# Altium PCB RFLOG V1.0.PcbDoc
Units mm, origin at the board's own origin, x right, y up, seen from the top; angles counter-clockwise.
Board outline 88 x 64 mm, 2 copper layers (Top Layer, Bottom Layer); 126 components, 96 nets, 492 pads, 0 vias.
Unrouted connection lines stored in the file: 339.
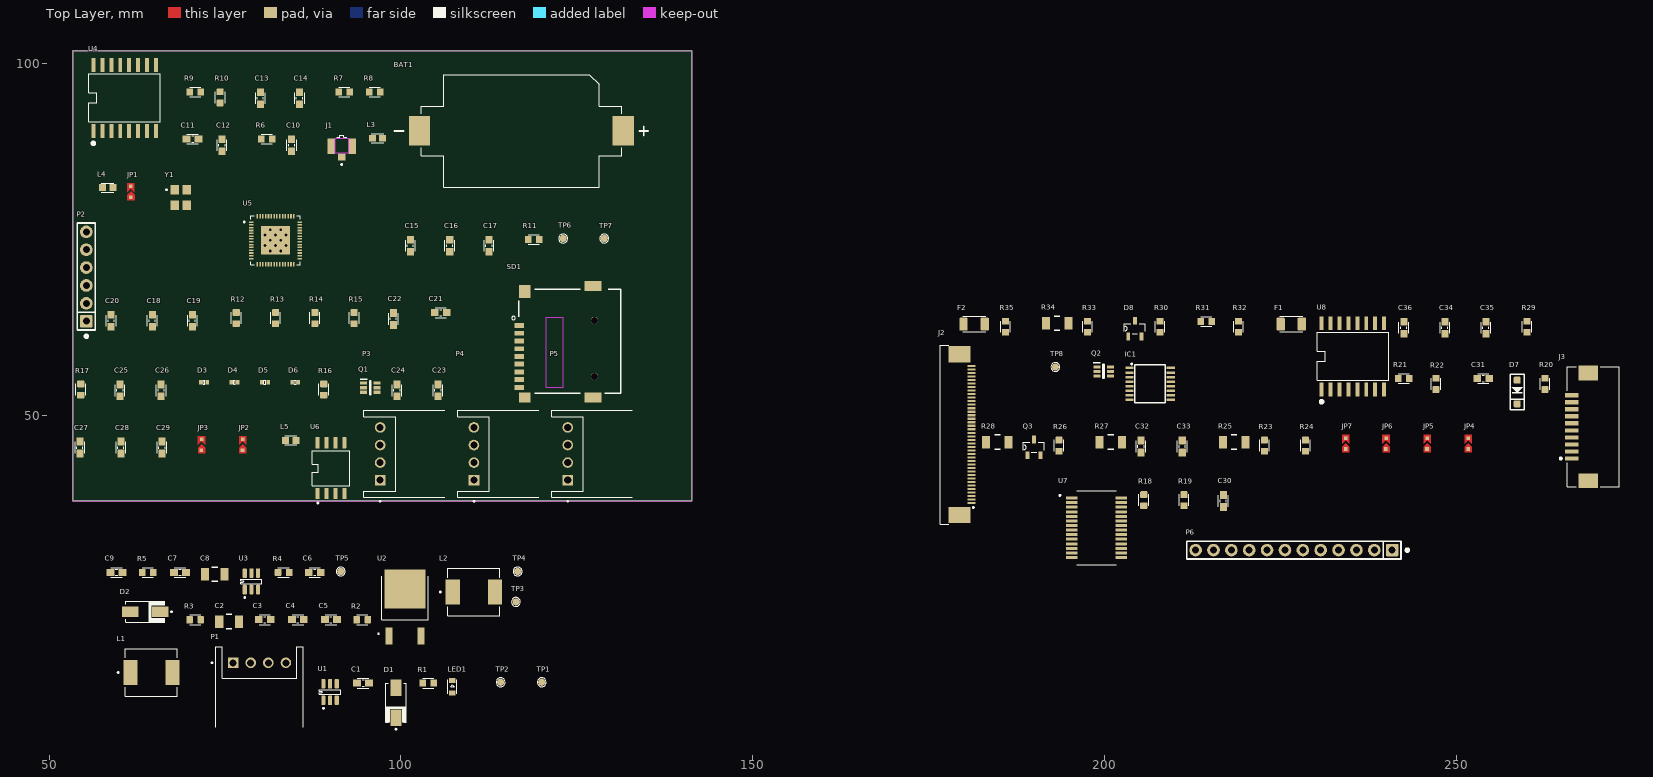
[diagram p0: Top Layer view]
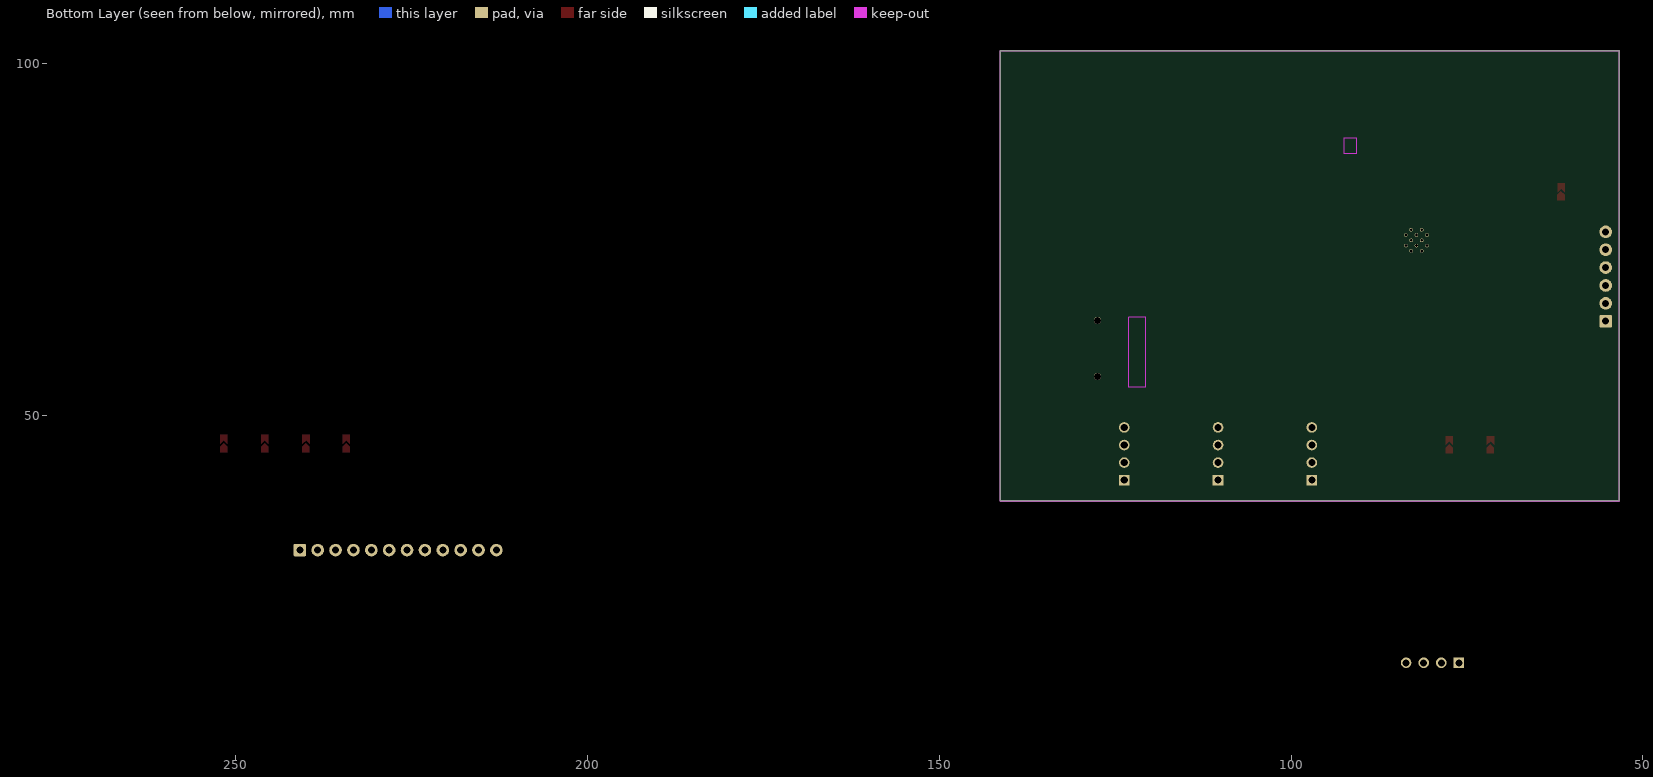
[diagram p1: Bottom Layer view, seen from below]

## Layer stack, top to bottom
Top Solder: solder mask 0.0102, Solder Resist, Dk 3.5
Top Layer: signal copper 0.0356
Dielectric 1: dielectric 0.32, FR-4, Dk 4.8
Bottom Layer: signal copper 0.0356
Bottom Solder: solder mask 0.0102, Solder Resist, Dk 3.5

## Board outline
53.34,37.854 53.34,101.854 141.34,101.854 141.34,37.854

## Design rules (kind name [scope] priority, off if disabled: settings)
Clearance [All] p1: gap=0.254 ignorepadtopadclearanceinfootprint=FALSE except(0: Arc-Hole Track-Hole SMDPad-Hole THPad-Hole Via-Hole Fill-Hole Poly-Hole Region-Hole Text-Hole)
PolygonConnect [All] p1: connectstyle=Relief reliefconductorwidth=0.254 reliefentries=4 polygonreliefangle="90 Angle" airgapwidth=0.254
RoomDefinition PSU [InComponentClass('PSU')] p1: confinementstyle=ConfineIn formatcopy=TRUE lockcomponents=FALSE outline 57.658,3.937 124.466,3.937 124.466,31.251 57.658,31.251
RoomDefinition MAIN [InComponentClass('MAIN')] p2: confinementstyle=ConfineIn formatcopy=TRUE lockcomponents=FALSE outline 53.34,36.738 137.048,36.738 137.048,103.413 53.34,103.413
RoomDefinition INTERFACE [InComponentClass('INTERFACE')] p3: confinementstyle=ConfineIn formatcopy=TRUE lockcomponents=FALSE outline 175.641,26.924 276.479,26.924 276.479,66.929 175.641,66.929
RoutingVias [All] p1: holewidth=0.711 width=1.27 viastyle="Through Hole" minholewidth=0.711 minwidth=1.27 maxholewidth=0.711 maxwidth=1.27
SolderMaskExpansion [All] p1: expansion=0.102 istentingtop=FALSE
Width [All] p1: maxlimit=0.254 minlimit=0.254 preferedwidth=0.254
30 further rules are at their usual default settings.

## Classes and differential pairs
component class PSU: C1 C2 C3 C4 C5 C6 C7 C8 C9 D1 D2 L1 L2 LED1 P1 R1 R2 R3 R4 R5 TP1 TP2 TP3 TP4 TP5 U1 U2 U3
component class MAIN: BAT1 C10 C11 C12 C13 C14 C15 C16 C17 C18 C19 C20 C21 C22 C23 C24 C25 C26 C27 C28 C29 D3 D4 D5 D6 J1 JP1 JP2 JP3 L3 L4 L5 P2 P3 P4 P5 Q1 R6 R7 R8 R9 R10 R11 R12 R13 R14 R15 R16 R17 SD1 TP6 TP7 U4 U5 U6 Y1
component class INTERFACE: C30 C31 C32 C33 C34 C35 C36 D7 D8 F1 F2 IC1 J2 J3 JP4 JP5 JP6 JP7 P6 Q2 Q3 R18 R19 R20 R21 R22 R23 R24 R25 R26 R27 R28 R29 R30 R31 R32 R33 R34 R35 TP8 U7 U8

## Components (designator, comment, footprint, x,y, rotation, side; value= is the part's Value field where it differs from the comment)
BAT1 "CR2032" CR2032-BS-6-1 117.109,90.459 r180 top
C1 "100nF" C0603 94.615,11.947 r0 top
C2 "10uF" C1206 75.565,20.71 r0 top
C3 "100nF" C0603 80.645,20.964 r0 top
C4 "22uF" C0603 85.344,20.964 r0 top
C5 "22uF" C0603 90.043,20.964 r0 top
C6 "22uF" C0603 87.757,27.695 r0 top
C7 "100nF" C0603 68.58,27.695 r0 top
C8 "10uF" C1206 73.533,27.441 r0 top
C9 "22uF" C0603 59.563,27.695 r0 top
C10 "100nF" C0603 84.47,88.411 r90 top
C11 "1.5pF" C0603 70.373,89.3 r0 top
C12 "1.5pF" C0603 74.564,88.411 r90 top
C13 "15pF" C0603 80.01,95.098 r90 top
C14 "15pF" C0603 85.598,95.098 r90 top
C15 "100nF" C0603 101.346,74.143 r90 top
C16 "1uF" C0603 106.934,74.143 r90 top
C17 "1uF" C0603 112.522,74.143 r90 top
C18 "10uF" C0603 64.643,63.475 r90 top
C19 "100nF" C0603 70.358,63.475 r90 top
C20 "100nF" C0603 58.801,63.475 r90 top
C21 "100nF" C0603 105.664,64.618 r0 top
C22 "100nF" C0603 98.933,63.729 r90 top
C23 "10uF" C0603 105.283,53.569 r90 top
C24 "100nF" C0603 99.441,53.569 r90 top
C25 "1uF" C0603 60.071,53.569 r90 top
C26 "100nF" C0603 65.913,53.569 r90 top
C27 "1uF" C0603 54.356,45.441 r90 top
C28 "100nF" C0603 60.198,45.441 r90 top
C29 "100nF" C0603 66.04,45.441 r90 top
C30 "100nF" C0603 216.916,37.846 r90 top
C31 "100nF" C0603 253.873,55.245 r0 top
C32 "10uF" C0603 205.232,45.593 r90 top
C33 "100nF" C0603 211.074,45.593 r90 top
C34 "100nF" C0603 248.412,62.484 r90 top
C35 "10uF" C0603 254.254,62.484 r90 top
C36 "100nF" C0603 242.57,62.484 r90 top
D1 "SS54" DO-214AC 99.314,9.153 r90 top
D2 "SS34" DO-214AC 63.633,22.098 r180 top
D3 "PESD0402-140" ESD0402 72.009,54.712 r0 top
D4 "PESD0402-140" ESD0402 76.327,54.712 r0 top
D5 "PESD0402-140" ESD0402 80.645,54.712 r0 top
D6 "PESD0402-140" ESD0402 84.963,54.712 r0 top
D7 "1N4148W" SOD-123F 258.699,53.34 r90 top
D8 "PSM712" SOT-23-3 204.343,62.357 r0 top
F1 "?V ?A" PPTC-1206 226.568,62.992 r0 top
F2 "?V ?A" PPTC-1206 181.483,62.992 r0 top
IC1 "TSC2046IPWR" TSSOP-16 206.502,54.483 r0 top
J1 "EXT ANT" IPEX_UF.L 91.582,88.284 r0 top
J2 "FPC-0.5-40P" "FPC_0.5_40P - TOP CONTACT" 181.102,47.288 r270 top
J3 "FPC-1.0-10P" "FPC_1.0_10P - BOTTOM CONTACT" 269.494,48.387 r90 top
JP1 "Open" SB_STM 61.595,82.017 r90 top
JP2 "Open" SB_STM 77.47,46.076 r90 top
JP3 "Open" SB_STM 71.628,46.076 r90 top
JP4 "RX4" SB_STM 251.714,46.228 r90 top
JP5 "RX2" SB_STM 245.872,46.228 r90 top
JP6 "TX2" SB_STM 240.03,46.228 r90 top
JP7 "TX4" SB_STM 234.315,46.228 r90 top
L1 "4.7uH/6A" "IND_2926 (7467)" 64.522,13.462 r0 top
L2 "22uH/3A" "IND_2926 (7467)" 110.363,24.901 r0 top
L3 "2.2nH" L0603 96.662,89.427 r0 top
L4 "22nH" L0603 58.293,82.398 r0 top
L5 "2.2nH" L0603 84.328,46.457 r0 top
LED1 "RED" LED0603 107.315,11.439 r90 top
P1 "BAT_PACK" JST_S4B-XH-A(LF)(SN) 79.889,9.144 r0 top
P2 "PROG" HDR-6P-2.54mm 55.26,63.408 r90 top
P3 "LUX" JST_S4B-XH-A(LF)(SN) 102.743,44.552 r90 top
P4 "HUMIDITY" JST_S4B-XH-A(LF)(SN) 116.078,44.552 r90 top
P5 "RS-485" JST_S4B-XH-A(LF)(SN) 129.413,44.552 r90 top
P6 "KEYPAD" HDR-12P-2.54mm 240.919,30.861 r180 top
Q1 "BSS138PS" SOT-363 95.631,53.95 r0 top
Q2 "BSS138PS" SOT-363 199.898,56.261 r0 top
Q3 "AO3400A" SOT-23-3 189.992,45.466 r0 top
R1 "2K2" R0603 103.886,11.947 r0 top
R2 "54K9/1%" R0603 94.488,20.964 r0 top
R3 "10K/1%" R0603 70.739,20.964 r0 top
R4 "86.6K/1%" R0603 83.312,27.695 r0 top
R5 "2K2/1%" R0603 64.008,27.695 r0 top
R6 "0R" R0603 80.914,89.3 r0 top
R7 "10K" R0603 91.948,95.987 r0 top
R8 "10K" R0603 96.266,95.987 r0 top
R9 "10K" R0603 70.739,95.987 r0 top
R10 "10K" R0603 74.295,95.225 r90 top
R11 "10K" R0603 118.872,75.032 r0 top
R12 "10K" R0603 76.581,63.856 r90 top
R13 "10K" R0603 82.169,63.856 r90 top
R14 "10K" R0603 87.757,63.856 r90 top
R15 "10K" R0603 93.345,63.856 r90 top
R16 "10K" R0603 89.027,53.696 r90 top
R17 "10K" R0603 54.483,53.696 r90 top
R18 "10K" R0603 205.613,37.973 r90 top
R19 "10K" R0603 211.328,37.973 r90 top
R20 "10K" R0603 262.636,54.483 r90 top
R21 "10K" R0603 242.57,55.245 r0 top
R22 "10K" R0603 247.142,54.483 r90 top
R23 "10K" R0603 222.758,45.72 r90 top
R24 "10K" R0603 228.6,45.72 r90 top
R25 "10R" R1206 218.44,46.228 r0 top
R26 "1K" R0603 193.548,45.72 r90 top
R27 "10R" R1206 200.914,46.228 r0 top
R28 "10R" R1206 184.785,46.228 r0 top
R29 "10K" R0603 260.096,62.611 r90 top
R30 "10K" R0603 207.899,62.611 r90 top
R31 "10K" R0603 214.503,63.373 r0 top
R32 "10K" R0603 219.075,62.611 r90 top
R33 "10K" R0603 197.612,62.611 r90 top
R34 "120R" R1206 193.294,63.119 r0 top
R35 "10K" R0603 185.928,62.611 r90 top
SD1 "TF-01A" TF-01A 123.992,60.563 r90 top
TP1 "GND" PAD 120.015,12.074 r90 top
TP2 "VBAT" PAD 114.173,12.074 r90 top
TP3 "+5V" PAD 116.338,23.495 r90 top
TP4 "+24V" PAD 116.586,27.822 r90 top
TP5 "+3.3V" PAD 91.44,27.822 r90 top
TP6 "EN" PAD 123.063,75.159 r90 top
TP7 "BOOT" PAD 128.905,75.159 r90 top
TP8 "Test Point" PAD 193.04,56.896 r90 top
U1 "TPS562201DDCR" SOT-23-6 89.916,10.677 r0 top
U2 "LD1117ADT33TR" DPAK 100.584,22.869 r0 top
U3 "MT3608" SOT-23-6 78.74,26.425 r0 top
U4 "DS3231" SOIC-16-WIDE 60.848,95.285 r0 top
U5 "ESP32-S3" ESP32-S3 82.169,74.905 r0 top
U6 "W25Q128JVSIQ" SOIC-8-208miL 90.043,42.52 r90 top
U7 "MCP23017T-E/SS" SSOP-28 198.882,34.036 r0 top
U8 "CA-IS3098W" SOIC-16-WIDE 235.458,58.547 r0 top
Y1 "40Mhz" OSC_SMD3225-4 68.707,81.001 r0 top

## Footprints (in the part's own frame and the unit in brackets; to place one, negate y for a bottom-side part, rotate by r counter-clockwise, add the part's x,y. Pads: shape width x height; smd on the part's side, far side on the other; paste and mask are expansions set on the pad)
C0603 [mm]
  rect 1.1x1 smd: 1(-0.85,0) 2(0.85,0)
  silkscreen extent -0.8,-0.69 0.8,0.69, body extent -0.8,-0.45 0.8,0.45, height 0.81
C1206 [mil] "SOD-323; 2 Leads; Body 2.7 x 1.6 mm, (LxW)"
  rect 45x70 smd: 1(-55,0) 2(55,0)
  silkscreen extent -16,-40 16,40, body extent -66,-34 66,34, height 55
CR2032-BS-6-1 [mm]
  rect 3x4.2 smd: N(14.5,0) P(-14.5,0)
  silkscreen extent -18.03,-8 18.03,8, body extent -15.65,-8 15.65,8, height 5.55
DO-214AC [mm]
  rect 2.33x1.55 smd: A(2.135,0) C(-2.135,0)
  silkscreen extent -3.85,-1.46 2.8,1.46, body extent -2.57,-1.28 2.57,1.28, height 2.62
DPAK [mm]
  rect 0.98x2.4 smd: 1(-2.28,-4.2) 2(2.28,-4.2)
  rect 5.86x5.57 smd paste-4: 3(0,2.47)
  silkscreen extent -3.89,-4 3.3,4.27, body extent -3.25,-4.74 3.25,4.98, height 2.17
ESD0402 [mm]
  rect 0.49x0.6 smd: 1(-0.457,0) 2(0.457,0)
  silkscreen extent -0.13,-0.25 0.13,0.28, body extent -0.5,-0.25 0.5,0.25, height 0.43
ESP32-S3 [mm]
  rect 0.65x0.22 smd mask+0.05: 1(-3.425,2.6) 2(-3.425,2.2) 3(-3.425,1.8) 4(-3.425,1.4) 5(-3.425,1) 6(-3.425,0.6) 7(-3.425,0.2) 8(-3.425,-0.2) 9(-3.425,-0.6) 10(-3.425,-1) 11(-3.425,-1.4) 12(-3.425,-1.8) 13(-3.425,-2.2) 14(-3.425,-2.6) 29(3.425,-2.6) 30(3.425,-2.2) 31(3.425,-1.8) 32(3.425,-1.4) 33(3.425,-1) 34(3.425,-0.6) 35(3.425,-0.2) 36(3.425,0.2) 37(3.425,0.6) 38(3.425,1) 39(3.425,1.4) 40(3.425,1.8) 41(3.425,2.2) 42(3.425,2.6)
  rect 0.22x0.65 smd mask+0.05: 15(-2.6,-3.425) 16(-2.2,-3.425) 17(-1.8,-3.425) 18(-1.4,-3.425) 19(-1,-3.425) 20(-0.6,-3.425) 21(-0.2,-3.425) 22(0.2,-3.425) 23(0.6,-3.425) 24(1,-3.425) 25(1.4,-3.425) 26(1.8,-3.425) 27(2.2,-3.425) 28(2.6,-3.425) 43(2.6,3.425) 44(2.2,3.425) 45(1.8,3.425) 46(1.4,3.425) 47(1,3.425) 48(0.6,3.425) 49(0.2,3.425) 50(-0.2,3.425) 51(-0.6,3.425) 52(-1,3.425) 53(-1.4,3.425) 54(-1.8,3.425) 55(-2.2,3.425) 56(-2.6,3.425)
  rect 4.1x4.1 smd paste-1.55: 57(0,0)
  round 0.5 hole 0.4 mask+0: 58(-0.75,1.5) 59(0.75,1.5) 60(-1.5,0.75) 61(0,0.75) 62(1.5,0.75) 63(-0.75,0) 64(0.75,0) 65(-1.5,-0.75) 66(0,-0.75) 67(1.5,-0.75) 68(-0.75,-1.5) 69(0.75,-1.5)
  silkscreen extent -4.55,-3.5 3.5,3.5, body extent -3.5,-3.5 3.5,3.5, height 0.9
"FPC_0.5_40P - TOP CONTACT" [mm]
  rect 0.3x1.1 smd: 1(9.75,0) 2(9.25,0) 3(8.75,0) 4(8.25,0) 5(7.75,0) 6(7.25,0) 7(6.75,0) 8(6.25,0) 9(5.75,0) 10(5.25,0) 11(4.75,0) 12(4.25,0) 13(3.75,0) 14(3.25,0) 15(2.75,0) 16(2.25,0) 17(1.75,0) 18(1.25,0) 19(0.75,0) 20(0.25,0) 21(-0.25,0) 22(-0.75,0) 23(-1.25,0) 24(-1.75,0) 25(-2.25,0) 26(-2.75,0) 27(-3.25,0) 28(-3.75,0) 29(-4.25,0) 30(-4.75,0) 31(-5.25,0) 32(-5.75,0) 33(-6.25,0) 34(-6.75,0) 35(-7.25,0) 36(-7.75,0) 37(-8.25,0) 38(-8.75,0) 39(-9.25,0) 40(-9.75,0)
  rect 2.3x3.1 smd: S1(-11.42,-1.7) S2(11.42,-1.7)
  silkscreen extent -12.72,-4.4 12.72,0.38, body extent -12.72,-4.71 12.72,0.4, height 2.05
"FPC_1.0_10P - BOTTOM CONTACT" [mm]
  rect 0.6x1.9 smd: 1(-4.5,3.05) 2(-3.5,3.05) 3(-2.5,3.05) 4(-1.5,3.05) 5(-0.5,3.05) 6(0.5,3.05) 7(1.5,3.05) 8(2.5,3.05) 9(3.5,3.05) 10(4.5,3.05)
  rect 2.1x2.8 smd: P1(-7.65,0.7) P2(7.65,0.7)
  silkscreen extent -8.51,-3.71 8.51,4.73, body extent -8.5,-3.25 8.5,3.5, height 2.5
HDR-6P-2.54mm [mm] "PinHeader 1x6 TH Pitch 2.54mm"
  rrect25% 1.8x1.8 hole 1: 1(0,0)
  round 1.8 hole 1: 2(2.54,0) 3(5.08,0) 4(7.62,0) 5(10.16,0) 6(12.7,0)
  silkscreen extent -2.3,-1.27 13.97,1.27, body extent -1.27,-1.27 13.97,1.27, height 9.5
HDR-12P-2.54mm [mm] "PinHeader 1x12 TH Pitch 2.54mm"
  rrect25% 1.8x1.8 hole 1: 1(0,0)
  round 1.8 hole 1: 2(2.54,0) 3(5.08,0) 4(7.62,0) 5(10.16,0) 6(12.7,0) 7(15.24,0) 8(17.78,0) 9(20.32,0) 10(22.86,0) 11(25.4,0) 12(27.94,0)
  silkscreen extent -2.3,-1.27 29.21,1.27, body extent -1.27,-1.27 29.21,1.27, height 9.5
"IND_2926 (7467)" [mm]
  rect 2x3.5 smd: 1(-3,0) 2(3,0)
  silkscreen extent -4.85,-3.35 3.7,3.35, body extent -3.7,-3.35 3.7,3.35, height 3
IPEX_UF.L [mm]
  rect 1x1.05 smd: 1(0,-1.525)
  rect 1.05x2.2 smd: 2(1.475,0) 3(-1.475,0)
  Keep-Out Layer region: 0.95,-1 -0.95,-1 -0.95,1.1 0.95,1.1
  silkscreen extent -0.7,-2.71 0.7,1.55, body extent -1.5,-1.55 1.5,1.55, height 1.25
JST_S4B-XH-A(LF)(SN) [mm]
  rect 1.508x1.508 / inner round 1.508 / far side rect 1.508x1.508 hole 1: 1(-3.75,5.7)
  round 1.508 hole 1: 2(-1.25,5.7) 3(1.25,5.7) 4(3.75,5.7)
  silkscreen extent -6.85,-3.5 6.2,8, body extent -6.2,-3.5 6.2,8, height 6.15
L0603 [mm]
  rect 1x0.97 smd: 1(-0.735,0) 2(0.735,0)
  silkscreen extent -0.88,-0.64 0.88,0.64, body extent -0.8,-0.4 0.8,0.4, height 0.95
LED0603 [mil] "LED SMT Pad"
  rect 30x37 smd: 1(-35,0) 2(35,0)
  silkscreen extent -40,-25 40,25, body extent -32,-15 32,14, height 27
OSC_SMD3225-4 [mm]
  rect 1.2x1.4 smd: 1(-0.85,1.1) 2(-0.85,-1.1) 3(0.85,-1.1) 4(0.85,1.1)
  silkscreen extent -2.15,1 -1.95,1.2, body extent -1.25,-1.6 1.25,1.6, height 0.8
PAD [mil] "Solder Pad"
  round 40 smd: 1(0,0)
  silkscreen extent -25,-25 25,25
PPTC-1206 [mm]
  rrect25% 1.2x1.82 smd: 1(-1.505,0) 2(1.505,0)
  silkscreen extent -1.63,-1.09 1.63,1.09, body extent -1.63,-0.82 1.63,0.82, height 0.83
R0603 [mm]
  rrect20% 0.94x1.02 smd: 1(-0.79,0) 2(0.79,0)
  silkscreen extent -0.8,-0.69 0.8,0.69, body extent -0.8,-0.4 0.8,0.4, height 0.45
R1206 [mil] "SOD-323; 2 Leads; Body 2.7 x 1.6 mm, (LxW)"
  rect 45x70 smd: 1(-62.99,0) 2(62.99,0)
  silkscreen extent -16,-40 16,40, body extent -63,-31 63,31, height 24
SB_STM [mm] "solder bridge"
  rect 0.5x0.5 smd: 1(-0.991,0) 2(0.559,-0.016)
  Top Layer region: -1.448,-0.525 -1.448,0.475 -0.648,0.475 -0.148,-0.025 -0.648,-0.525
  Top Layer region: -0.255,0.484 0.241,-0.013 -0.262,-0.516 1.001,-0.516 1.001,0.484
SOD-123F [mm] "SMD"
  rrect30% 1x1 smd: A(1.675,0) K(-1.675,0)
  silkscreen extent -2.5,-1 2.5,1, body extent -1.9,-0.8 1.9,0.8, height 1
SOIC-8-208miL [mm]
  rrect25% 1.61x0.58 smd: 1(-3.605,1.905) 2(-3.605,0.635) 3(-3.605,-0.635) 4(-3.605,-1.905) 5(3.605,-1.905) 6(3.605,-0.635) 7(3.605,0.635) 8(3.605,1.905)
  silkscreen extent -5.06,-2.69 2.5,2.69, body extent -3.95,-2.64 3.95,2.64, height 2.16
SOIC-16-WIDE [mil]
  rect 22x78 smd: 1(-180,-190) 2(-130,-190) 3(-80,-190) 4(-30,-190) 5(20,-190) 6(70,-190) 7(120,-190) 8(170,-190) 9(170,180) 10(120,180) 11(70,180) 12(20,180) 13(-30,180) 14(-80,180) 15(-130,180) 16(-180,180)
  silkscreen extent -205,-266 195,130, body extent -208,-208 198,198, height 104
SOT-23-3 [mil]
  rect 22x44 smd: 1(-37,-44) 2(37,-44) 3(0,44)
  silkscreen extent -59,-28 59,28, body extent -57,-47 57,47, height 45
SOT-23-6 [mm]
  rrect50% 0.59x1.37 smd: 1(-0.95,-1.17) 2(0,-1.17) 3(0.95,-1.17) 4(0.95,1.17) 5(0,1.17) 6(-0.95,1.17)
  silkscreen extent -1.5,-2.4 1.5,0.33, body extent -1.45,-1.4 1.45,1.4, height 1.45
SOT-363 [mm]
  rect 1x0.45 smd: 1(-0.95,0.65) 2(-0.95,0) 3(-0.95,-0.65) 4(0.95,-0.65) 5(0.95,0) 6(0.95,0.65)
  silkscreen extent -1.45,-1 0.1,1.22, body extent -1.05,-1.06 1.05,1.09, height 0.95
SSOP-28 [mm]
  rrect30% 1.651x0.432 smd: 1(-3.505,4.225) 2(-3.505,3.575) 3(-3.505,2.925) 4(-3.505,2.275) 5(-3.505,1.625) 6(-3.505,0.975) 7(-3.505,0.325) 8(-3.505,-0.325) 9(-3.505,-0.975) 10(-3.505,-1.625) 11(-3.505,-2.275) 12(-3.505,-2.925) 13(-3.505,-3.575) 14(-3.505,-4.225) 15(3.505,-4.225) 16(3.505,-3.575) 17(3.505,-2.925) 18(3.505,-2.275) 19(3.505,-1.625) 20(3.505,-0.975) 21(3.505,-0.325) 22(3.505,0.325) 23(3.505,0.975) 24(3.505,1.625) 25(3.505,2.275) 26(3.505,2.925) 27(3.505,3.575) 28(3.505,4.225)
  silkscreen extent -5.3,-5.25 2.8,5.25, body extent -3.9,-5.1 3.9,5.1, height 2
TF-01A [mm]
  rect 0.7x1.3 smd: 1(2.23,7.174) 2(1.13,7.174) 3(0.03,7.174) 4(-1.07,7.174) 5(-2.17,7.174) 6(-3.27,7.174) 7(-4.37,7.174) 8(-5.47,7.174) CD1(-6.57,7.174)
  rect 1.448x1.651 smd: MP1(-7.989,6.4)
  rect 1.448x2.438 smd: MP2(-7.989,-3.3) MP3(7.836,-3.3)
  rect 1.854x1.651 smd: MP4(7.061,6.4)
  round 1 hole 1 unplated: ""(-5.004,-3.531) ""(2.972,-3.531)
  Keep-Out Layer lines w0.127: -6.528,3.302 -6.528,0.94 3.429,0.94 3.429,3.302 -6.528,3.302
  silkscreen extent -7.4,-7.26 7.4,8.24, body extent -8.07,-7.57 8.03,7.63, height 2
TSSOP-16 [mm]
  rect 1.2x0.35 smd: 1(-2.925,2.275) 2(-2.925,1.625) 3(-2.925,0.975) 4(-2.925,0.325) 5(-2.925,-0.325) 6(-2.925,-0.975) 7(-2.925,-1.625) 8(-2.925,-2.275) 9(2.925,-2.275) 10(2.925,-1.625) 11(2.925,-0.975) 12(2.925,-0.325) 13(2.925,0.325) 14(2.925,0.975) 15(2.925,1.625) 16(2.925,2.275)
  silkscreen extent -2.72,-2.7 2.15,2.95, body extent -3.2,-2.5 3.2,2.5, height 1.1

## Part data
BAT1: library part CR2032-BS-6-1, "Battery base CR2032 SMD Battery Connectors", ComponentLink1Description=Datasheet
C1 C3 C4 C5 C6 C7 C9 C10 C11 C12 C15 C16 C17 C18 C19 C20 C21 C22 C23 C24 C25 C26 C27 C28 C29 C30 C31 C32 C33 C34 C35 C36: library part "Capacitor 0603 (Inch)", "0603 SMD Non-Polarity Capacitor", ComponentLink1Description=Datasheet
C2 C8: library part "Capacitor 1206 (Inch)", "1206 SMD Non-Polarity Capacitor", ComponentLink1Description=Datasheet
C13 C14: library part "Capacitor 0603 (Inch)", "0603 SMD Non-Polarity Capacitor", LCSC Part #=C9010, MFR.Part #=X322540MPB4SI, ComponentLink1Description=Datasheet
  C13: ComponentLink1URL=https://www.lcsc.com/datasheet/C9010.pdf
D1: "40V Independent 550mV@5A 5A SMA(DO-214AC) Schottky Diodes", LCSC Part #=C22452, ComponentLink1Description=Datasheet, ComponentLink1URL=https://www.lcsc.com/datasheet/C22452.pdf, MFR.Part #=SS54
D2: "Schottky SS34 DO-214AC", LCSC Part #=C3040628, ComponentLink1Description=Datasheet, ComponentLink1URL=https://www.lcsc.com/datasheet/C3040628.pdf, MFR.Part #=SS34
D3 D4 D5 D6: "40V Bidirectional 14V 0402 ESD and Surge Protection (TVS/ESD) ROHS", JLCPCB Part=C10662, LCSC Part #=C83330, Package="DO-214 Littelfuse", Availability="In Stock", Check_prices=https://www.snapeda.com/parts/SMAJ6.5CA/Littelfuse/view-part/?ref=eda, MF=Littelfuse, MP=SMAJ6.5CA, Price=None, Purchase-URL=https://pricing.snapeda.com/search/part/SMAJ6.5CA/?ref=eda, SnapEDA_Link=https://www.snapeda.com/parts/SMAJ6.5CA/Littelfuse/view-part/?ref=snap
D7: LCSC Part #=C81598, ComponentLink1Description=Datasheet, ComponentLink1URL=https://www.lcsc.com/datasheet/C81598.pdf, MFR.Part #=1N4148W
D8: "31V, 19V Clamp 19A (8/20µs) Ipp Tvs Diode", LCSC Part #=C2687124, Mfr. Part #=PSM712-LF-T7, ComponentLink1Description=Datasheet, ComponentLink1URL=https://lcsc.com/datasheet/lcsc_datasheet_2311091738_UMW-Youtai-Semiconductor-Co---Ltd--PSM712-LF-T7_C2687124.pdf
F1 F2: library part "PPTC 1206", "PPTC RESET FUSE", ComponentLink1Description=Datasheet
IC1: "12 2V~5.25V TSSOP-16 Touch Screen Controllers ROHS", LCSC Part #=C8954, ComponentLink1Description=Datasheet, ComponentLink1URL=https://www.lcsc.com/datasheet/C8954.pdf, MFR.Part #=TSC2046IPWR
J1: library part "IPEX UF.L", "1 POS Vertical SMD Small form factor with big performance through 6 GHz connector,MHF, RF, micro-coaxial MHF I Receptacle", ComponentLink1Description=Datasheet
J2: "Connector: FFC / FPC; horizontal; PIN: 40; ZIF, top contacts; SMT", ComponentLink1Description=Datasheet
J3: "Connector: FFC / FPC; horizontal; PIN: 10; ZIF", LatestRevisionDate=17-Jul-2002, LatestRevisionNote="Re-released for DXP Platform.", Publisher="Altium Limited"
JP1 JP2 JP3 JP4 JP5 JP6 JP7: library part "Jumper Solder", "Jumper Solder Pad", Published=24-Mar-1999, Publisher="Altium Limited", Revision="July-2002: Re-released for DXP Platform."
L1: library part "INDUCTOR 2926", "Inductor with Package: 2926 (7467)", ComponentLink1Description=Datasheet
L2: library part "INDUCTOR 2926", "Inductor with Package: 2926 (7467)", LCSC Part #=C497873, MFR.Part #=YSPI0630A-220M, ComponentLink1Description=Datasheet, ComponentLink1URL=https://www.lcsc.com/datasheet/C497873.pdf
L3: library part "INDUCTOR 0603", "Inductor with Package: 0603 Inch", ComponentLink1Description=Datasheet
L4: library part "INDUCTOR 0603", "Inductor with Package: 0603 Inch", LCSC Part #=C90207, MFR.Part #=VHF160808H22NJT, ComponentLink1Description=Datasheet, ComponentLink1URL=https://www.lcsc.com/datasheet/C90207.pdf
L5: library part "INDUCTOR 0603", "Inductor with Package: 0603 Inch", LCSC Part #=C71648, MFR.Part #=LQW18AN2N2C80D, ComponentLink1Description=Datasheet, ComponentLink1URL=https://www.lcsc.com/datasheet/C71648.pdf
LED1: library part "LED 0603", "0603 LED", ComponentLink1Description=Datasheet
P1 P3 P4 P5: library part "Connector 4P", "CONNECTOR HEADER", LatestRevisionDate=17-Jul-2002, LatestRevisionNote="Re-released for DXP Platform.", Publisher="Altium Limited"
P2: library part "Header 6", "Header, 6-Pin", LatestRevisionDate=17-Jul-2002, LatestRevisionNote="Re-released for DXP Platform.", Publisher="Altium Limited"
P6: library part "Header 12", "Header, 12-Pin", LatestRevisionDate=17-Jul-2002, LatestRevisionNote="Re-released for DXP Platform.", Publisher="Altium Limited"
Q1 Q2: "60 V, 320 mA dual N-channel Trench MOSFET", LCSC Part #=C193381, MFR.Part #=BSS138PS,115, ComponentLink1Description=Datasheet, ComponentLink1URL=https://www.lcsc.com/datasheet/lcsc_datasheet_2410121736_Nexperia-BSS138PS-115_C193381.pdf
Q3: "N-Channel 30 V 5.8A 1.4W", LCSC Part #=C20917, ComponentLink1Description=Datasheet, ComponentLink1URL=https://www.lcsc.com/datasheet/lcsc_datasheet_2410121838_Alpha---Omega-Semicon-AO3400A_C20917.pdf, MFR.Part #=AO3400A
R1 R2 R3 R4 R5 R6 R7 R8 R9 R10 R11 R12 R13 R14 R15 R16 R17 R18 R19 R20 R21 R22 R23 R24 R26 R29 R30 R31 R32 R33 R35: library part "Resistor 0603 (Inch)", "0603 SMD Thick Resistor", ComponentLink1Description=Datasheet
R25 R27 R28 R34: library part "Resistor 1206 (Inch)", "1206 SMD Thick Resistor", ComponentLink1Description=Datasheet
SD1: "Standard Card Edge Connectors", LCSC Part #=C2889258, Package=Package, Availability="Not in stock", Check_prices=https://www.snapeda.com/parts/TF-01A/HRO+Electronics+Co.%252C+Ltd./view-part/?ref=eda, MF="HRO Electronics Co., Ltd.", MP=TF-01A, Price=None, SnapEDA_Link=https://www.snapeda.com/parts/TF-01A/HRO+Electronics+Co.%252C+Ltd./view-part/?ref=snap
TP1 TP2 TP3 TP4 TP5 TP6 TP7: library part "Test Point", "Thick Pad"
TP8: "Thick Pad"
U1: "4.5 V to 17 V input, 2 A output, synchronous step-down converter in Eco-mode", LCSC Part #=C90061, ComponentLink1Description=Datasheet, ComponentLink1URL=https://www.lcsc.com/datasheet/C90061.pdf, MFR.Part #=TPS562201DDCR
U2: "Linear Voltage Regulator IC Positive Fixed 1 Output 3.3V 1A", LCSC Part #=C6186, Package=None, Availability=Unavailable, MP=AMS1117-5.0, Price=None
U3: "High Efficiency 1.2MHz2A Step Up Converter", LCSC Part #=C84817, ComponentLink1Description=Datasheet, ComponentLink1URL=https://www.lcsc.com/datasheet/C84817.pdf, MFR.Part #=MT3608
U4: "Real Time Clock (RTC) IC Clock/Calendar - IÂ²C, 2-Wire Serial 8-SOIC (0.154, 3.90mm Width)", LCSC Part #=C9866, MFR.Part #=DS3231SN#T&R, ComponentLink1Description=Datasheet, ComponentLink1URL=https://www.lcsc.com/datasheet/C9866.pdf
U5: "IC RF TxRx + MCU Bluetooth, WiFi 802.11b/g/n, Bluetooth v5.0 2.412GHz ~ 2.484GHz 56-VFQFN Exposed Pad", ComponentLink1Description=Datasheet
U6: "FLASH - NOR Memory IC 128Mb (16M x 8) SPI - Quad I/O, QPI, DTR 133 MHz 8-SOIC", ComponentLink1Description=Datasheet
U7: "16-bit Input/Output Expander, I2C interface, Pb-free28 SSOP .209in T/R", LCSC Part #=C558584, ComponentLink1Description=Datasheet, ComponentLink1URL=https://www.lcsc.com/datasheet/C558584.pdf, MFR.Part #=MCP23017T-E/SS
U8: "SOIC16-WB(W) Isolated RS-485/422 Transceivers with power, 20Mbps", LCSC Part #=C7422557, ComponentLink1Description=Datasheet, ComponentLink1URL=https://www.lcsc.com/datasheet/C7422557.pdf, MFR.Part #=CA-IS3098W
Y1: library part XTAL-40Mhz, "40MHz Crystal Oscillator 15pF ±10ppm ±20ppm SMD3225-4P Crystals ROHS", LCSC Part #=C9010, MFR.Part #=X322540MPB4SI, ComponentLink1Description=Datasheet, ComponentLink1URL=https://www.lcsc.com/datasheet/C9010.pdf

## Nets (pads, with @x,y where several pads share a name; then routed paths per layer and width w, separated by ;. In a path a pad name is that pad's centre, name@x,y a point inside that pad or via, vN(x,y) a via of type N, cw(c..) or ccw(c..) an arc to the next point about the centre after c; other vN are vias at no path point)
+3.3V: C8.2 C10.2 C18.2 C19.2 C21.2 C22.1 C23.2 C24.2 C27.2 C28.2 C30.2 C31.2 C32.1 C33.2 C34.2 IC1.1 IC1.9 IC1.10 J2.6 J2.7 J2.12 J2.33 J2.38 J2.39 J2.40 L5.1 P2.6 P3.1 P4.1 Q2.2 Q2.5 R7.1 R8.1 R9.2 R10.2 R11.2 R12.2 R13.2 R14.2 R15.2 R18.2 R19.2 R20.2 R21.2 R23.2 R30.2 R31.2 R32.2 SD1.4 TP5.1 U2.3 U4.2 U5.20 U5.46 U5.55 U5.56 U7.9 U8.1
+3.3VDD: C20.2 C29.2 L5.2 U5.2 U5.3
+5V: C4.2 C5.2 C7.2 J3.1 J3.2 J3.3 L1.2 R2.2 R22.2 R24.2 TP3.1 U2.2
+24V: C6.2 D2.C P5.1 R4.2 TP4.1
BAT+: D1.A P1.1
BAT-: BAT1.N C2.1 C3.1 C4.1 C5.1 C6.1 C7.1 C8.1 C9.1 C10.1 C11.1 C12.1 C13.1 C14.1 C15.2 C16.2 C17.2 C18.1 C19.1 C20.1 C21.1 C22.2 C23.1 C24.1 C25.1 C26.1 C27.1 C28.1 C29.1 C30.1 C31.1 C32.2 C33.1 C34.1 D3.1 D4.1 D5.1 D6.1 IC1.6 IC1.7 IC1.8 J1.2 J1.3 J2.5 J2.16 J2.17 J2.18 J2.19 J2.20 J2.21 J2.22 J2.23 J2.24 J2.25 J2.26 J2.27 J2.28 J2.29 J2.30 J2.31 J2.32 J2.37 J2.S1 J2.S2 J3.8 J3.9 J3.10 LED1.2 P1.2 P2.1 P3.4 P4.4 P5.4 Q3.2 R3.1 R5.1 R29.1 SD1.6 SD1.MP1 SD1.MP2 SD1.MP3 SD1.MP4 TP1.1 U1.1 U2.1 U3.2 U4.13 U5.57 U6.4 U7.10 U7.15 U7.16 U7.17 U8.2 U8.7 U8.8 Y1.2 Y1.4
CHIP_PU: C15.1 C16.1 Q1.6 R7.2 TP6.1 U5.4
DTR: P2.3 Q1.4 R16.1
GMB: C35.2 C36.2 D8.3 R33.1 U8.9 U8.15
GPIO0: C17.1 Q1.3 R8.2 TP7.1 U5.5
KEY_C1: P6.7 U7.7
KEY_C2: P6.8 U7.8
KEY_C3: P6.9 U7.21
KEY_C4: P6.10 U7.22
KEY_C5: P6.11 U7.23
KEY_C6: P6.12 U7.24
KEY_R1: P6.1 U7.1
KEY_R2: P6.2 U7.2
KEY_R3: P6.3 U7.3
KEY_R4: P6.4 U7.4
KEY_R5: P6.5 U7.5
KEY_R6: P6.6 U7.6
LNA_IN: C12.2 L3.2 R6.1 U5.1
NetBAT1_P: BAT1.P U4.14
NetC1_1: C1.1 U1.6
NetC1_2: C1.2 L1.1 U1.2
NetC11_2: C11.2 JP1.2 L3.1
NetC13_2: C13.2 L4.2 Y1.1
NetD2_A: D2.A L2.2 U3.1
NetD7_A: D7.A J2.14
NetD8_1: D8.1 F1.1 R33.2 R34.2 U8.13
NetD8_2: D8.2 F2.1 R34.1 R35.2 U8.12
NetF1_2: F1.2 P5.3
NetF2_2: F2.2 P5.2
NetIC1_11: IC1.11 U5.26
NetIC1_13: IC1.13 TP8.1
NetIC1_15: IC1.15 U5.12
NetJ1_1: J1.1 JP1.1 R6.2
NetJ2_9: J2.9 U5.15
NetJ2_10: J2.10 U5.19
NetJ2_15: J2.15 U5.27
NetJ2_34: J2.34 R25.2
NetJ2_35: J2.35 R27.2
NetJ2_36: J2.36 R28.2
NetJ3_4: J3.4 JP4.2
NetJ3_5: J3.5 JP5.2
NetJ3_6: J3.6 JP6.2
NetJ3_7: J3.7 JP7.2
NetJP2_1: JP2.1 P1.3
NetJP3_1: JP3.1 P1.4
NetJP4_1: JP4.1 JP5.1 Q2.6 R22.1
NetJP6_1: JP6.1 JP7.1 Q2.3 R24.1
NetLED1_1: LED1.1 R1.2
NetQ1_2: Q1.2 R16.2
NetQ1_5: Q1.5 R17.2
NetQ2_1: Q2.1 R21.1 U5.7
NetQ2_4: Q2.4 R23.1 U5.6
NetQ3_1: Q3.1 R26.1 R29.2
NetQ3_3: Q3.3 R25.1 R27.1 R28.1
NetR2_1: R2.1 R3.2 U1.4
NetR4_1: R4.1 R5.2 U3.3
NetR11_1: R11.1 U4.4
NetR18_1: R18.1 U5.10 U7.19
NetR19_1: R19.1 U5.11 U7.20
NetR20_1: R20.1 U5.9 U7.18
NetR26_2: R26.2 U5.21
NetR30_1: R30.1 U5.23 U8.6
NetR31_1: R31.1 U5.22 U8.4 U8.5
NetR32_1: R32.1 U5.24 U8.3
RTS: P2.2 Q1.1 R17.1
RXD0: P2.5 U5.50
SCL: JP3.2 P3.2 P4.2 R9.1 U4.16 U5.13 U7.12
SD_CLK: D4.2 R13.1 SD1.5
SD_CS1: D6.2 R15.1 SD1.2
SD_MI: D3.2 R12.1 SD1.7
SD_MO: D5.2 R14.1 SD1.3
SDA: JP2.2 P3.3 P4.3 R10.1 U4.15 U5.14 U7.13
SPICLK: U5.33 U6.6
SPICS0: U5.32 U6.1
SPID: U5.35 U6.5
SPIHD: U5.30 U6.7
SPIQ: U5.34 U6.2
SPIWP: U5.31 U6.3
TS_MISO: D7.K IC1.12 U5.18
TS_MOSI: IC1.14 J2.13 U5.16
TS_SCK: IC1.16 J2.11 U5.17
TXD0: P2.4 U5.49
VBAT: C2.2 C3.2 C9.2 D1.C L2.1 R1.1 TP2.1 U1.3 U3.4 U3.5
VFM: C25.2 C26.2 U5.29 U6.8
VMB: C35.1 C36.1 R35.1 U8.10 U8.16
X1: L4.1 U5.54
X2: C14.2 U5.53 Y1.3
XL: IC1.4 J2.1
XR: IC1.2 J2.3
YD: IC1.3 J2.4
YU: IC1.5 J2.2
pads on no net: J2.8 J3.P1 J3.P2 SD1. SD1.1 SD1.8 SD1.CD1 U1.5 U3.6 U4.1 U4.3 U4.5 U4.6 U4.7 U4.8 U4.9 U4.10 U4.11 U4.12 U5.8 U5.25 U5.28 U5.36 U5.37 U5.38 U5.39 U5.40 U5.41 U5.42 U5.43 U5.44 U5.45 U5.47 U5.48 U5.51 U5.52 U5.58 U5.59 U5.60 U5.61 U5.62 U5.63 U5.64 U5.65 U5.66 U5.67 U5.68 U5.69 U7.11 U7.14 U7.25 U7.26 U7.27 U7.28 U8.11 U8.14

## Keep-outs
Keep-Out Layer:
  the board outline again, w0.254

## Text inside footprints (layer, text, board x,y; h text height)
J2: Mechanical 13 "PCB Edge" at 177.345,33.512 h1.27 r270
P1: Mechanical 13 "PCB Edge" at 86.556,5.941 h0.81
P3: Mechanical 13 "PCB Edge" at 105.946,51.219 h0.81 r90
P4: Mechanical 13 "PCB Edge" at 119.281,51.219 h0.81 r90
P5: Mechanical 13 "PCB Edge" at 132.616,51.219 h0.81 r90